# EAGLE board Qwiic Pressure Sensor - MS5637-Panel (EAGLE 9.2.1)
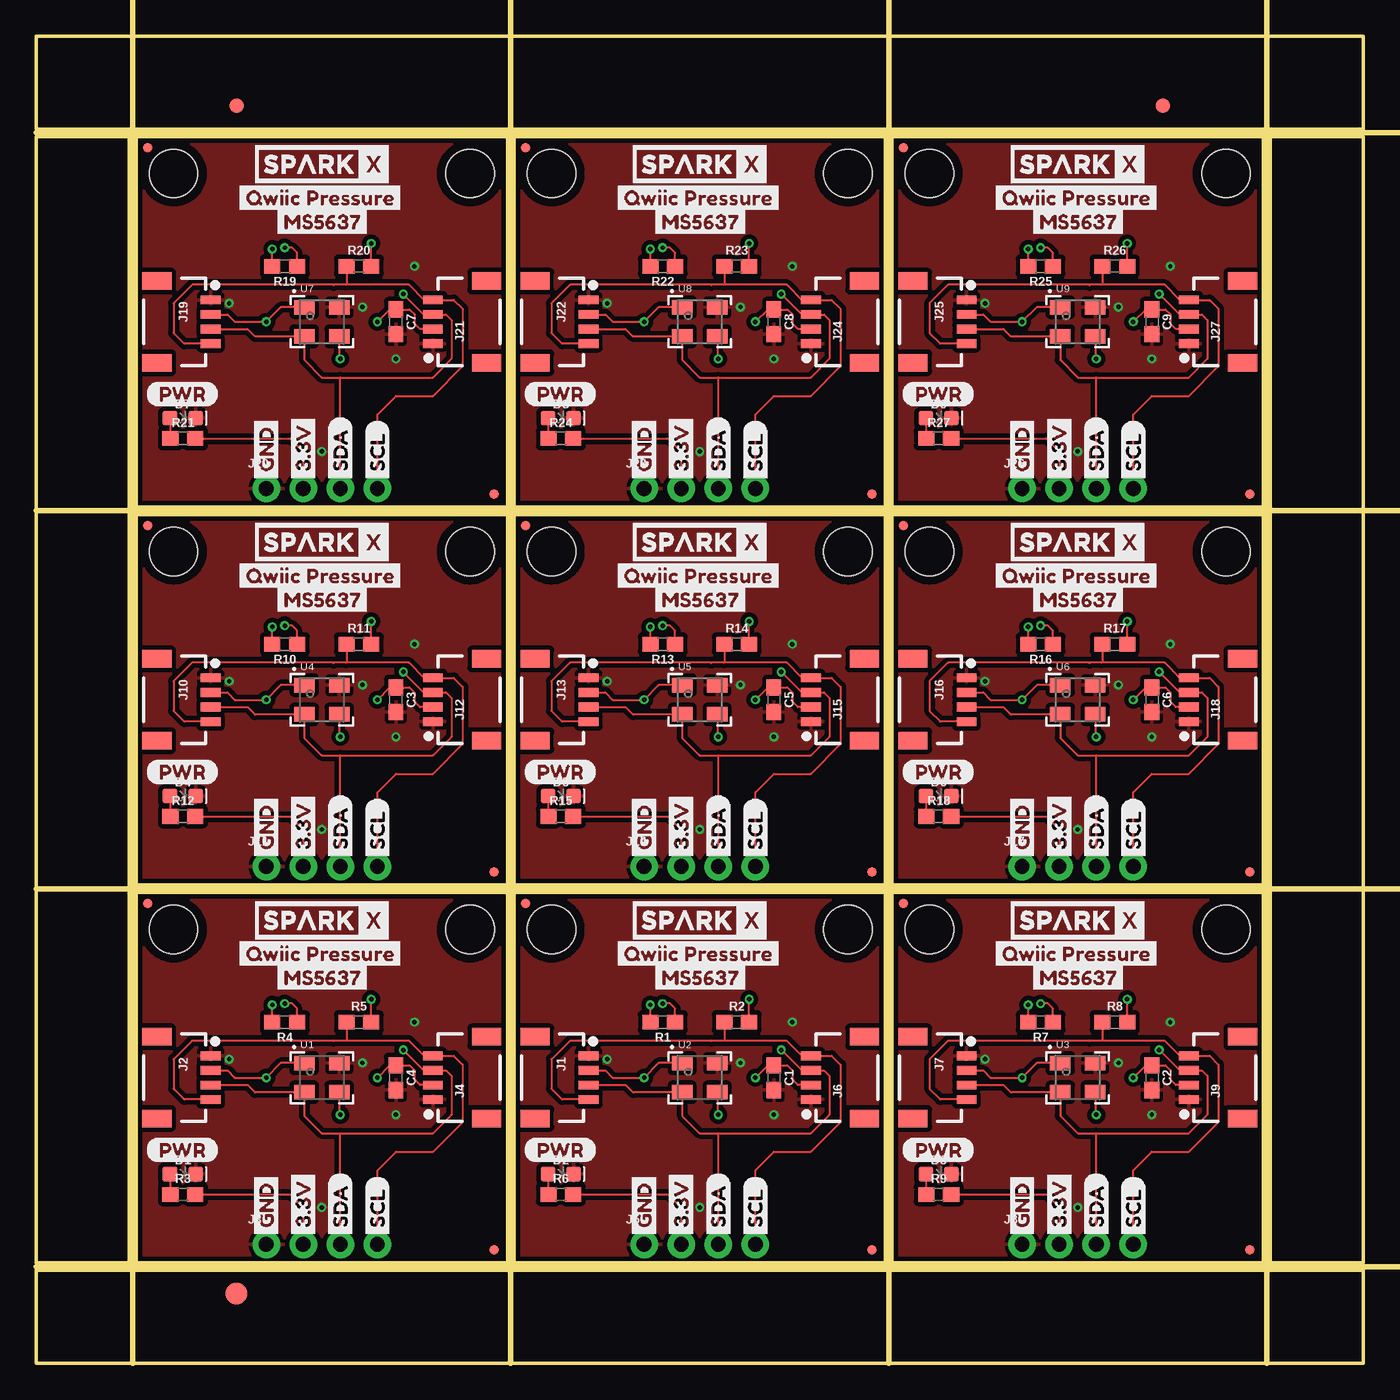
[diagram p0: board, top side]
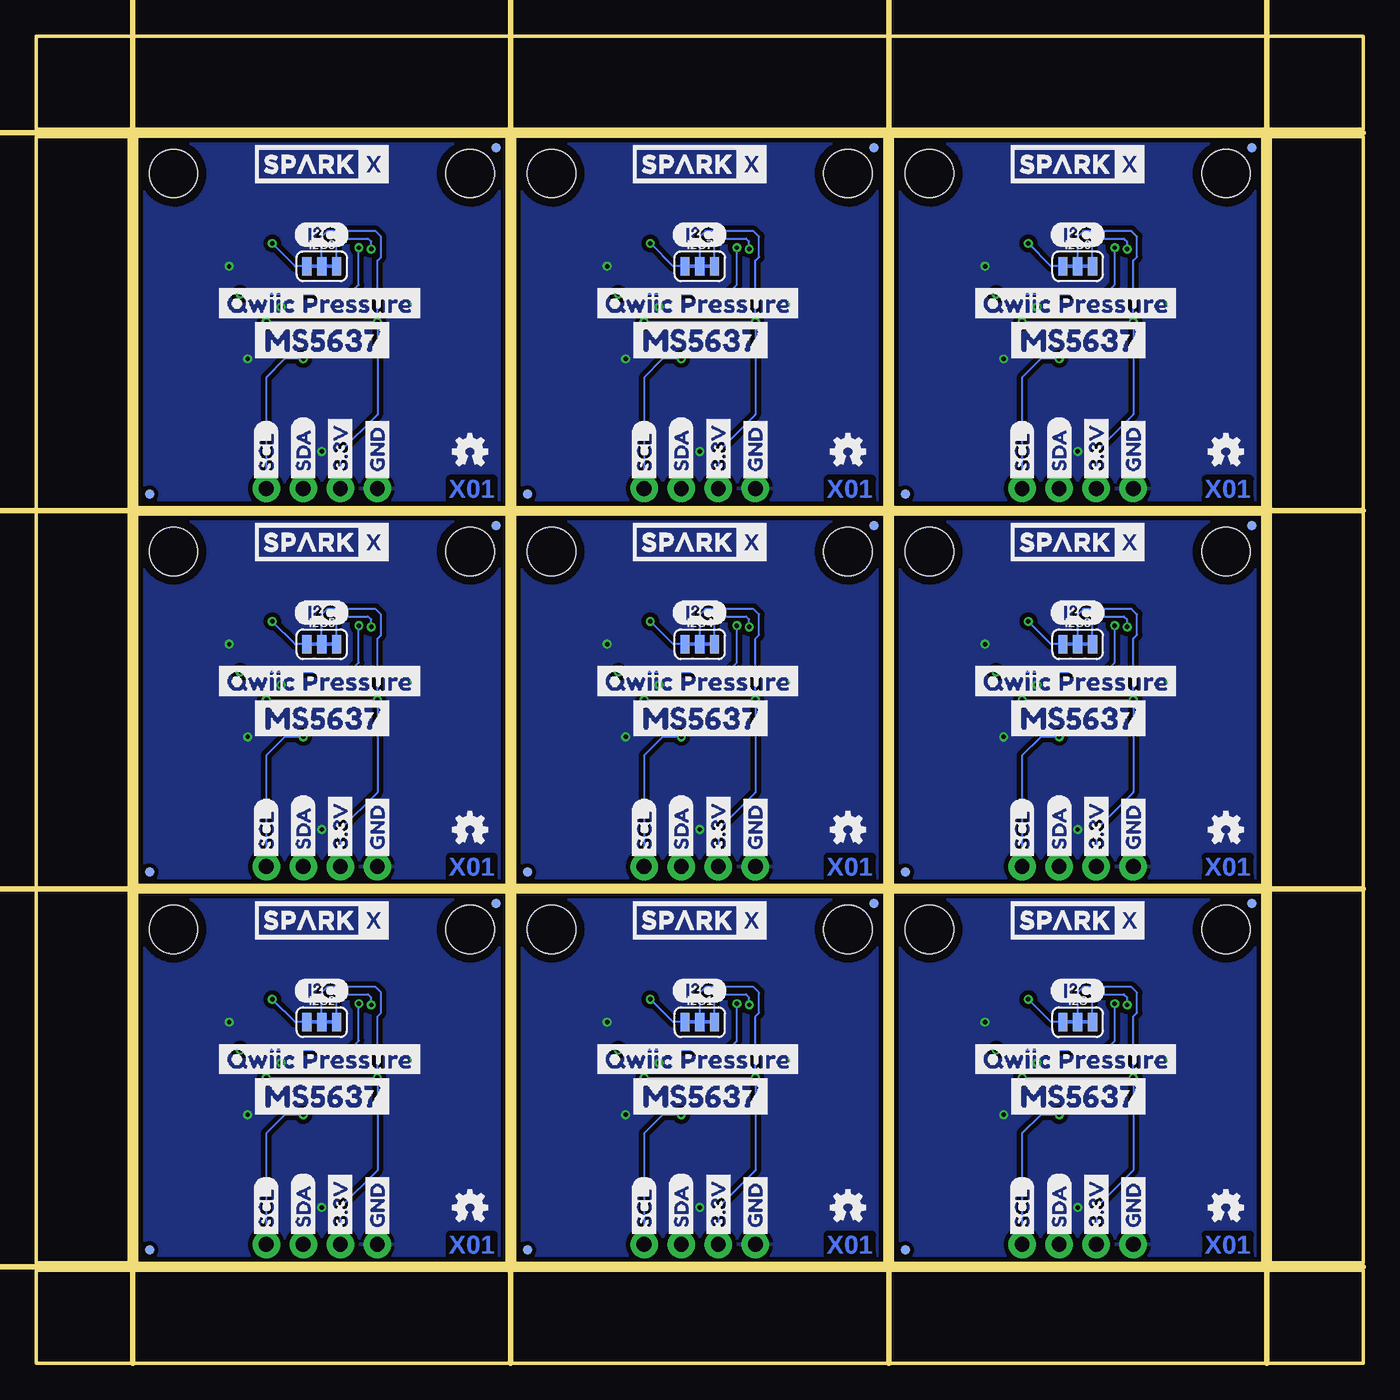
[diagram p1: board, bottom side, seen from below]

Size 90.93 x 90.93 mm. Coordinates in mm from the lower left corner, seen from the top.
Outline: 6.86,6.86 6.86,32.26 32.26,32.26 32.26,6.86 6.86,6.86
Outline: 32.77,6.86 32.77,32.26 58.17,32.26 58.17,6.86 32.77,6.86
Outline: 58.67,6.86 58.67,32.26 84.07,32.26 84.07,6.86 58.67,6.86
Outline: 6.86,32.77 6.86,58.17 32.26,58.17 32.26,32.77 6.86,32.77
Outline: 32.77,32.77 32.77,58.17 58.17,58.17 58.17,32.77 32.77,32.77
Outline: 58.67,32.77 58.67,58.17 84.07,58.17 84.07,32.77 58.67,32.77
Outline: 6.86,58.67 6.86,84.07 32.26,84.07 32.26,58.67 6.86,58.67
Outline: 32.77,58.67 32.77,84.07 58.17,84.07 58.17,58.67 32.77,58.67
Outline: 58.67,58.67 58.67,84.07 84.07,84.07 84.07,58.67 58.67,58.67
Outline: 0,6.35 90.93,6.35 90.93,0 0,0 0,6.35
Outline: 84.58,84.07 90.93,84.07 90.93,6.86 84.58,6.86 84.58,84.07
Outline: 0,90.93 90.93,90.93 90.93,84.58 0,84.58 0,90.93
Outline: 0,84.07 6.35,84.07 6.35,6.86 0,6.86 0,84.07
Copper layers (1*16): Top 0.035mm / dielectric 1.5mm / Bottom 0.035mm
Design rules "SparkFun-2-layer-PCBWay-LIMIT": minimum track width 6mil, minimum drill 0.3mm, track to track 6mil, track to pad 6mil, pad to pad 6mil, via to via 6mil, smd to smd 6mil, copper to edge 6mil, drill to drill 6mil, minimum pad ring 6mil, minimum via ring 6mil, stop-mask expansion 4mil, vias tented up to drill 25mil, thermal gap 10mil
Milling: 8 lines

## Footprints (pad centres in the part's own frame; a part is rotated, then mirrored left to right if it is on the bottom)
0603 = smd 1.1 x 1: 1 -0.85,0; 2 0.85,0
LED-0603 = smd 1 x 1: A -0.877,0; C 0.877,0
FIDUCIAL-1X2 = smd 1 x 1: 1 0,0
FIDUCIAL-1.5X3 = smd 1.5 x 1.5: 1 0,0
SMT-JUMPER_3_2-NC_TRACE_SILK = smd 0.635 x 1.27: 1 -1.016,0; 2 0,0; 3 1.016,0
1X04_1MM_RA = smd 0.6 x 1.35: 1 -1.5,0; 2 -0.5,0; 3 0.5,0; 4 1.5,0 | smd 1.2 x 2: NC1 2.8,-3.675; NC2 -2.8,-3.675
1X04_NO_SILK = drill 1.016 pad 1.88: 1 0,0; 2 2.54,0; 3 5.08,0; 4 7.62,0
MICRO-FIDUCIAL = smd 0.635 x 0.635: 1 0,0
STAND-OFF = hole 3.302: 0,0
MS5637 = smd 1.4 x 1: 1 -1.2,1; 2 -1.2,-1; 3 1.2,-1; 4 1.2,1

## Placement (x,y rotation side)
C1  0.1uF  [0603]  50.55,19.56 270 top
C2  0.1uF  [0603]  76.45,19.56 270 top
C3  0.1uF  [0603]  24.64,45.47 270 top
C4  0.1uF  [0603]  24.64,19.56 270 top
C5  0.1uF  [0603]  50.55,45.47 270 top
C6  0.1uF  [0603]  76.45,45.47 270 top
C7  0.1uF  [0603]  24.64,71.37 270 top
C8  0.1uF  [0603]  50.55,71.37 270 top
C9  0.1uF  [0603]  76.45,71.37 270 top
D1  RED  [LED-0603]  10.03,12.95 0 top
D2  RED  [LED-0603]  35.94,12.95 0 top
D3  RED  [LED-0603]  61.85,12.95 0 top
D4  RED  [LED-0603]  10.03,38.86 0 top
D5  RED  [LED-0603]  35.94,38.86 0 top
D6  RED  [LED-0603]  61.85,38.86 0 top
D7  RED  [LED-0603]  10.03,64.77 0 top
D8  RED  [LED-0603]  35.94,64.77 0 top
D9  RED  [LED-0603]  61.85,64.77 0 top
E$1  [FIDUCIAL-1X2]  13.72,86.17 0 top
E$2  [FIDUCIAL-1X2]  77.22,86.17 0 top
E$3  [FIDUCIAL-1.5X3]  13.72,4.76 0 top
I2C  [SMT-JUMPER_3_2-NC_TRACE_SILK]  19.56,23.37 0 bottom
I2C1  [SMT-JUMPER_3_2-NC_TRACE_SILK]  45.47,23.37 0 bottom
I2C2  [SMT-JUMPER_3_2-NC_TRACE_SILK]  71.37,23.37 0 bottom
I2C3  [SMT-JUMPER_3_2-NC_TRACE_SILK]  19.56,49.28 0 bottom
I2C4  [SMT-JUMPER_3_2-NC_TRACE_SILK]  45.47,49.28 0 bottom
I2C5  [SMT-JUMPER_3_2-NC_TRACE_SILK]  71.37,49.28 0 bottom
I2C6  [SMT-JUMPER_3_2-NC_TRACE_SILK]  19.56,75.18 0 bottom
I2C7  [SMT-JUMPER_3_2-NC_TRACE_SILK]  45.47,75.18 0 bottom
I2C8  [SMT-JUMPER_3_2-NC_TRACE_SILK]  71.37,75.18 0 bottom
J1  [1X04_1MM_RA]  37.85,19.56 270 top
J2  [1X04_1MM_RA]  11.94,19.56 270 top
J3  PTH  [1X04_NO_SILK]  15.75,8.13 0 top
J4  [1X04_1MM_RA]  27.18,19.56 90 top
J5  PTH  [1X04_NO_SILK]  41.66,8.13 0 top
J6  [1X04_1MM_RA]  53.09,19.56 90 top
J7  [1X04_1MM_RA]  63.75,19.56 270 top
J8  PTH  [1X04_NO_SILK]  67.56,8.13 0 top
J9  [1X04_1MM_RA]  78.99,19.56 90 top
J10  [1X04_1MM_RA]  11.94,45.47 270 top
J11  PTH  [1X04_NO_SILK]  15.75,34.04 0 top
J12  [1X04_1MM_RA]  27.18,45.47 90 top
J13  [1X04_1MM_RA]  37.85,45.47 270 top
J14  PTH  [1X04_NO_SILK]  41.66,34.04 0 top
J15  [1X04_1MM_RA]  53.09,45.47 90 top
J16  [1X04_1MM_RA]  63.75,45.47 270 top
J17  PTH  [1X04_NO_SILK]  67.56,34.04 0 top
J18  [1X04_1MM_RA]  78.99,45.47 90 top
J19  [1X04_1MM_RA]  11.94,71.37 270 top
J20  PTH  [1X04_NO_SILK]  15.75,59.94 0 top
J21  [1X04_1MM_RA]  27.18,71.37 90 top
J22  [1X04_1MM_RA]  37.85,71.37 270 top
J23  PTH  [1X04_NO_SILK]  41.66,59.94 0 top
J24  [1X04_1MM_RA]  53.09,71.37 90 top
J25  [1X04_1MM_RA]  63.75,71.37 270 top
J26  PTH  [1X04_NO_SILK]  67.56,59.94 0 top
J27  [1X04_1MM_RA]  78.99,71.37 90 top
JP1  FIDUCIALUFIDUCIAL  [MICRO-FIDUCIAL]  7.62,31.5 0 bottom
JP2  FIDUCIALUFIDUCIAL  [MICRO-FIDUCIAL]  31.37,7.75 0 top
JP3  STAND-OFF  [STAND-OFF]  9.4,29.72 0 top
JP4  STAND-OFF  [STAND-OFF]  29.72,29.72 0 top
JP5  FIDUCIALUFIDUCIAL  [MICRO-FIDUCIAL]  31.37,7.75 0 bottom
JP6  FIDUCIALUFIDUCIAL  [MICRO-FIDUCIAL]  7.62,31.5 0 top
JP7  STAND-OFF  [STAND-OFF]  35.31,29.72 0 top
JP8  STAND-OFF  [STAND-OFF]  55.63,29.72 0 top
JP9  FIDUCIALUFIDUCIAL  [MICRO-FIDUCIAL]  57.28,7.75 0 top
JP10  FIDUCIALUFIDUCIAL  [MICRO-FIDUCIAL]  33.53,31.5 0 top
JP11  FIDUCIALUFIDUCIAL  [MICRO-FIDUCIAL]  33.53,31.5 0 bottom
JP12  FIDUCIALUFIDUCIAL  [MICRO-FIDUCIAL]  57.28,7.75 0 bottom
JP13  STAND-OFF  [STAND-OFF]  61.21,29.72 0 top
JP14  STAND-OFF  [STAND-OFF]  81.53,29.72 0 top
JP15  FIDUCIALUFIDUCIAL  [MICRO-FIDUCIAL]  83.19,7.75 0 top
JP16  FIDUCIALUFIDUCIAL  [MICRO-FIDUCIAL]  59.44,31.5 0 top
JP17  FIDUCIALUFIDUCIAL  [MICRO-FIDUCIAL]  59.44,31.5 0 bottom
JP18  FIDUCIALUFIDUCIAL  [MICRO-FIDUCIAL]  83.19,7.75 0 bottom
JP19  STAND-OFF  [STAND-OFF]  9.4,55.63 0 top
JP20  STAND-OFF  [STAND-OFF]  29.72,55.63 0 top
JP21  FIDUCIALUFIDUCIAL  [MICRO-FIDUCIAL]  31.37,33.66 0 top
JP22  FIDUCIALUFIDUCIAL  [MICRO-FIDUCIAL]  7.62,57.4 0 top
JP23  FIDUCIALUFIDUCIAL  [MICRO-FIDUCIAL]  7.62,57.4 0 bottom
JP24  FIDUCIALUFIDUCIAL  [MICRO-FIDUCIAL]  31.37,33.66 0 bottom
JP25  STAND-OFF  [STAND-OFF]  35.31,55.63 0 top
JP26  STAND-OFF  [STAND-OFF]  55.63,55.63 0 top
JP27  FIDUCIALUFIDUCIAL  [MICRO-FIDUCIAL]  57.28,33.66 0 top
JP28  FIDUCIALUFIDUCIAL  [MICRO-FIDUCIAL]  33.53,57.4 0 top
JP29  FIDUCIALUFIDUCIAL  [MICRO-FIDUCIAL]  33.53,57.4 0 bottom
JP30  FIDUCIALUFIDUCIAL  [MICRO-FIDUCIAL]  57.28,33.66 0 bottom
JP31  STAND-OFF  [STAND-OFF]  61.21,55.63 0 top
JP32  STAND-OFF  [STAND-OFF]  81.53,55.63 0 top
JP33  FIDUCIALUFIDUCIAL  [MICRO-FIDUCIAL]  83.19,33.66 0 top
JP34  FIDUCIALUFIDUCIAL  [MICRO-FIDUCIAL]  59.44,57.4 0 top
JP35  FIDUCIALUFIDUCIAL  [MICRO-FIDUCIAL]  59.44,57.4 0 bottom
JP36  FIDUCIALUFIDUCIAL  [MICRO-FIDUCIAL]  83.19,33.66 0 bottom
JP37  STAND-OFF  [STAND-OFF]  9.4,81.53 0 top
JP38  STAND-OFF  [STAND-OFF]  29.72,81.53 0 top
JP39  FIDUCIALUFIDUCIAL  [MICRO-FIDUCIAL]  31.37,59.56 0 top
JP40  FIDUCIALUFIDUCIAL  [MICRO-FIDUCIAL]  7.62,83.31 0 top
JP41  FIDUCIALUFIDUCIAL  [MICRO-FIDUCIAL]  7.62,83.31 0 bottom
JP42  FIDUCIALUFIDUCIAL  [MICRO-FIDUCIAL]  31.37,59.56 0 bottom
JP43  STAND-OFF  [STAND-OFF]  35.31,81.53 0 top
JP44  STAND-OFF  [STAND-OFF]  55.63,81.53 0 top
JP45  FIDUCIALUFIDUCIAL  [MICRO-FIDUCIAL]  57.28,59.56 0 top
JP46  FIDUCIALUFIDUCIAL  [MICRO-FIDUCIAL]  33.53,83.31 0 top
JP47  FIDUCIALUFIDUCIAL  [MICRO-FIDUCIAL]  33.53,83.31 0 bottom
JP48  FIDUCIALUFIDUCIAL  [MICRO-FIDUCIAL]  57.28,59.56 0 bottom
JP49  STAND-OFF  [STAND-OFF]  61.21,81.53 0 top
JP50  STAND-OFF  [STAND-OFF]  81.53,81.53 0 top
JP51  FIDUCIALUFIDUCIAL  [MICRO-FIDUCIAL]  83.19,59.56 0 top
JP52  FIDUCIALUFIDUCIAL  [MICRO-FIDUCIAL]  59.44,83.31 0 top
JP53  FIDUCIALUFIDUCIAL  [MICRO-FIDUCIAL]  59.44,83.31 0 bottom
JP54  FIDUCIALUFIDUCIAL  [MICRO-FIDUCIAL]  83.19,59.56 0 bottom
LOGO1  OSHW-LOGOMINI  [OSHW-LOGO-MINI]  9.4,10.67 0 bottom
LOGO2  OSHW-LOGOMINI  [OSHW-LOGO-MINI]  35.31,10.67 0 bottom
LOGO3  OSHW-LOGOMINI  [OSHW-LOGO-MINI]  61.21,10.67 0 bottom
LOGO4  OSHW-LOGOMINI  [OSHW-LOGO-MINI]  9.4,36.58 0 bottom
LOGO5  OSHW-LOGOMINI  [OSHW-LOGO-MINI]  35.31,36.58 0 bottom
LOGO6  OSHW-LOGOMINI  [OSHW-LOGO-MINI]  61.21,36.58 0 bottom
LOGO7  OSHW-LOGOMINI  [OSHW-LOGO-MINI]  9.4,62.48 0 bottom
LOGO8  OSHW-LOGOMINI  [OSHW-LOGO-MINI]  35.31,62.48 0 bottom
LOGO9  OSHW-LOGOMINI  [OSHW-LOGO-MINI]  61.21,62.48 0 bottom
R1  2.2k  [0603]  42.93,23.37 180 top
R2  2.2k  [0603]  48.01,23.37 0 top
R3  1k  [0603]  10.03,11.56 0 top
R4  2.2k  [0603]  17.02,23.37 180 top
R5  2.2k  [0603]  22.1,23.37 0 top
R6  1k  [0603]  35.94,11.56 0 top
R7  2.2k  [0603]  68.83,23.37 180 top
R8  2.2k  [0603]  73.91,23.37 0 top
R9  1k  [0603]  61.85,11.56 0 top
R10  2.2k  [0603]  17.02,49.28 180 top
R11  2.2k  [0603]  22.1,49.28 0 top
R12  1k  [0603]  10.03,37.46 0 top
R13  2.2k  [0603]  42.93,49.28 180 top
R14  2.2k  [0603]  48.01,49.28 0 top
R15  1k  [0603]  35.94,37.46 0 top
R16  2.2k  [0603]  68.83,49.28 180 top
R17  2.2k  [0603]  73.91,49.28 0 top
R18  1k  [0603]  61.85,37.46 0 top
R19  2.2k  [0603]  17.02,75.18 180 top
R20  2.2k  [0603]  22.1,75.18 0 top
R21  1k  [0603]  10.03,63.37 0 top
R22  2.2k  [0603]  42.93,75.18 180 top
R23  2.2k  [0603]  48.01,75.18 0 top
R24  1k  [0603]  35.94,63.37 0 top
R25  2.2k  [0603]  68.83,75.18 180 top
R26  2.2k  [0603]  73.91,75.18 0 top
R27  1k  [0603]  61.85,63.37 0 top
U1  MS5637  [MS5637]  19.56,19.56 0 top
U2  MS5637  [MS5637]  45.47,19.56 0 top
U3  MS5637  [MS5637]  71.37,19.56 0 top
U4  MS5637  [MS5637]  19.56,45.47 0 top
U5  MS5637  [MS5637]  45.47,45.47 0 top
U6  MS5637  [MS5637]  71.37,45.47 0 top
U7  MS5637  [MS5637]  19.56,71.37 0 top
U8  MS5637  [MS5637]  45.47,71.37 0 top
U9  MS5637  [MS5637]  71.37,71.37 0 top
U$1  SPARKX-LOGO4  [SPARKX-MEDIUM]  19.56,30.35 0 top
U$2  SPARKX-LOGO4  [SPARKX-MEDIUM]  19.56,30.35 0 bottom
U$3  [GND1]  15.75,8.38 90 bottom
U$4  [3#3V2]  18.29,8.38 90 bottom
U$5  [SDA8]  20.83,8.38 90 bottom
U$6  [SCL9]  23.37,8.38 90 bottom
U$7  [MS56371]  16,26.42 0 top
U$8  [QWIIC_PRESSURE0]  13.46,28.07 0 top
U$9  SPARKX-LOGO4  [SPARKX-MEDIUM]  45.47,30.35 0 bottom
U$10  [(PWR)]  7.49,14.61 0 top
U$11  [(I_SUPER2_C)]  21.46,25.53 0 bottom
U$12  SPARKX-LOGO4  [SPARKX-MEDIUM]  45.47,30.35 0 top
U$13  [QWIIC_PRESSURE0]  27.18,20.83 0 bottom
U$14  [MS56371]  24.89,18.29 0 bottom
U$15  [3#3V2]  44.2,8.38 90 top
U$16  [GND1]  41.66,8.38 90 top
U$17  [SCL9]  49.28,8.38 90 top
U$18  [SDA8]  46.74,8.38 90 top
U$19  [GND1]  41.66,8.38 90 bottom
U$20  [3#3V2]  44.2,8.38 90 bottom
U$21  [3#3V2]  18.29,8.38 90 top
U$22  [GND1]  15.75,8.38 90 top
U$23  [SDA8]  46.74,8.38 90 bottom
U$24  [SCL9]  49.28,8.38 90 bottom
U$25  [(PWR)]  33.4,14.61 0 top
U$26  [SCL9]  23.37,8.38 90 top
U$27  [SDA8]  20.83,8.38 90 top
U$28  [(I_SUPER2_C)]  47.37,25.53 0 bottom
U$29  [QWIIC_PRESSURE0]  53.09,20.83 0 bottom
U$30  [MS56371]  50.8,18.29 0 bottom
U$31  [MS56371]  41.91,26.42 0 top
U$32  [QWIIC_PRESSURE0]  39.37,28.07 0 top
U$33  SPARKX-LOGO4  [SPARKX-MEDIUM]  71.37,30.35 0 bottom
U$34  SPARKX-LOGO4  [SPARKX-MEDIUM]  71.37,30.35 0 top
U$35  [3#3V2]  70.1,8.38 90 top
U$36  [GND1]  67.56,8.38 90 top
U$37  [SCL9]  75.18,8.38 90 top
U$38  [SDA8]  72.64,8.38 90 top
U$39  [GND1]  67.56,8.38 90 bottom
U$40  [3#3V2]  70.1,8.38 90 bottom
U$41  [SDA8]  72.64,8.38 90 bottom
U$42  [SCL9]  75.18,8.38 90 bottom
U$43  [(PWR)]  59.31,14.61 0 top
U$44  [(I_SUPER2_C)]  73.28,25.53 0 bottom
U$45  [QWIIC_PRESSURE0]  78.99,20.83 0 bottom
U$46  [MS56371]  76.71,18.29 0 bottom
U$47  [MS56371]  67.82,26.42 0 top
U$48  [QWIIC_PRESSURE0]  65.28,28.07 0 top
U$49  SPARKX-LOGO4  [SPARKX-MEDIUM]  19.56,56.26 0 bottom
U$50  SPARKX-LOGO4  [SPARKX-MEDIUM]  19.56,56.26 0 top
U$51  [3#3V2]  18.29,34.29 90 top
U$52  [GND1]  15.75,34.29 90 top
U$53  [SCL9]  23.37,34.29 90 top
U$54  [SDA8]  20.83,34.29 90 top
U$55  [GND1]  15.75,34.29 90 bottom
U$56  [3#3V2]  18.29,34.29 90 bottom
U$57  [SDA8]  20.83,34.29 90 bottom
U$58  [SCL9]  23.37,34.29 90 bottom
U$59  [(PWR)]  7.49,40.51 0 top
U$60  [(I_SUPER2_C)]  21.46,51.43 0 bottom
U$61  [QWIIC_PRESSURE0]  27.18,46.74 0 bottom
U$62  [MS56371]  24.89,44.2 0 bottom
U$63  [MS56371]  16,52.32 0 top
U$64  [QWIIC_PRESSURE0]  13.46,53.97 0 top
U$65  SPARKX-LOGO4  [SPARKX-MEDIUM]  45.47,56.26 0 bottom
U$66  SPARKX-LOGO4  [SPARKX-MEDIUM]  45.47,56.26 0 top
U$67  [3#3V2]  44.2,34.29 90 top
U$68  [GND1]  41.66,34.29 90 top
U$69  [SCL9]  49.28,34.29 90 top
U$70  [SDA8]  46.74,34.29 90 top
U$71  [GND1]  41.66,34.29 90 bottom
U$72  [3#3V2]  44.2,34.29 90 bottom
U$73  [SDA8]  46.74,34.29 90 bottom
U$74  [SCL9]  49.28,34.29 90 bottom
U$75  [(PWR)]  33.4,40.51 0 top
U$76  [(I_SUPER2_C)]  47.37,51.43 0 bottom
U$77  [QWIIC_PRESSURE0]  53.09,46.74 0 bottom
U$78  [MS56371]  50.8,44.2 0 bottom
U$79  [MS56371]  41.91,52.32 0 top
U$80  [QWIIC_PRESSURE0]  39.37,53.97 0 top
U$81  SPARKX-LOGO4  [SPARKX-MEDIUM]  71.37,56.26 0 bottom
U$82  SPARKX-LOGO4  [SPARKX-MEDIUM]  71.37,56.26 0 top
U$83  [3#3V2]  70.1,34.29 90 top
U$84  [GND1]  67.56,34.29 90 top
U$85  [SCL9]  75.18,34.29 90 top
U$86  [SDA8]  72.64,34.29 90 top
U$87  [GND1]  67.56,34.29 90 bottom
U$88  [3#3V2]  70.1,34.29 90 bottom
U$89  [SDA8]  72.64,34.29 90 bottom
U$90  [SCL9]  75.18,34.29 90 bottom
U$91  [(PWR)]  59.31,40.51 0 top
U$92  [(I_SUPER2_C)]  73.28,51.43 0 bottom
U$93  [QWIIC_PRESSURE0]  78.99,46.74 0 bottom
U$94  [MS56371]  76.71,44.2 0 bottom
U$95  [MS56371]  67.82,52.32 0 top
U$96  [QWIIC_PRESSURE0]  65.28,53.97 0 top
U$97  SPARKX-LOGO4  [SPARKX-MEDIUM]  19.56,82.17 0 bottom
U$98  SPARKX-LOGO4  [SPARKX-MEDIUM]  19.56,82.17 0 top
U$99  [3#3V2]  18.29,60.2 90 top
U$100  [GND1]  15.75,60.2 90 top
U$101  [SCL9]  23.37,60.2 90 top
U$102  [SDA8]  20.83,60.2 90 top
U$103  [GND1]  15.75,60.2 90 bottom
U$104  [3#3V2]  18.29,60.2 90 bottom
U$105  [SDA8]  20.83,60.2 90 bottom
U$106  [SCL9]  23.37,60.2 90 bottom
U$107  [(PWR)]  7.49,66.42 0 top
U$108  [(I_SUPER2_C)]  21.46,77.34 0 bottom
U$109  [QWIIC_PRESSURE0]  27.18,72.64 0 bottom
U$110  [MS56371]  24.89,70.1 0 bottom
U$111  [MS56371]  16,78.23 0 top
U$112  [QWIIC_PRESSURE0]  13.46,79.88 0 top
U$113  SPARKX-LOGO4  [SPARKX-MEDIUM]  45.47,82.17 0 bottom
U$114  SPARKX-LOGO4  [SPARKX-MEDIUM]  45.47,82.17 0 top
U$115  [3#3V2]  44.2,60.2 90 top
U$116  [GND1]  41.66,60.2 90 top
U$117  [SCL9]  49.28,60.2 90 top
U$118  [SDA8]  46.74,60.2 90 top
U$119  [GND1]  41.66,60.2 90 bottom
U$120  [3#3V2]  44.2,60.2 90 bottom
U$121  [SDA8]  46.74,60.2 90 bottom
U$122  [SCL9]  49.28,60.2 90 bottom
U$123  [(PWR)]  33.4,66.42 0 top
U$124  [(I_SUPER2_C)]  47.37,77.34 0 bottom
U$125  [QWIIC_PRESSURE0]  53.09,72.64 0 bottom
U$126  [MS56371]  50.8,70.1 0 bottom
U$127  [MS56371]  41.91,78.23 0 top
U$128  [QWIIC_PRESSURE0]  39.37,79.88 0 top
U$129  SPARKX-LOGO4  [SPARKX-MEDIUM]  71.37,82.17 0 bottom
U$130  SPARKX-LOGO4  [SPARKX-MEDIUM]  71.37,82.17 0 top
U$131  [3#3V2]  70.1,60.2 90 top
U$132  [GND1]  67.56,60.2 90 top
U$133  [SCL9]  75.18,60.2 90 top
U$134  [SDA8]  72.64,60.2 90 top
U$135  [GND1]  67.56,60.2 90 bottom
U$136  [3#3V2]  70.1,60.2 90 bottom
U$137  [SDA8]  72.64,60.2 90 bottom
U$138  [SCL9]  75.18,60.2 90 bottom
U$139  [(PWR)]  59.31,66.42 0 top
U$140  [(I_SUPER2_C)]  73.28,77.34 0 bottom
U$141  [QWIIC_PRESSURE0]  78.99,72.64 0 bottom
U$142  [MS56371]  76.71,70.1 0 bottom
U$143  [MS56371]  67.82,78.23 0 top
U$144  [QWIIC_PRESSURE0]  65.28,79.88 0 top

## Library data of the parts
C1-C9 = SparkFun-Capacitors; PROD_ID: CAP-00810
D1-D9 = SparkFun-LED; PROD_ID: DIO-00819
E$1 E$2 LOGO1-LOGO9 = SparkFun-Aesthetics
E$3 = SparkFun-Retired
I2C I2C1-I2C8 = SparkFun-Jumpers
J1 J2 J4 J6 J7 J9 J10 J12 J13 J15 J16 J18 J19 J21 J22 J24 J25 J27 = SparkFun-Connectors; PROD_ID: CONN-13694
J3 J5 J8 J11 J14 J17 J20 J23 J26 U$1 U$2 U$9 U$12 U$33 U$34 U$49 U$50 U$65 U$66 U$81 U$82 U$97 U$98 U$113 U$114 U$129 U$130 = SparkX
JP1-JP54 = SparkFun
R1 R2 R4 R5 R7 R8 R10 R11 R13 R14 R16 R17 R19 R20 R22 R23 R25 R26 = SparkFun-Resistors; PROD_ID: RES-08272
R3 R6 R9 R12 R15 R18 R21 R24 R27 = SparkFun-Resistors; PROD_ID: RES-07856
U1-U9 = MS5637
U$3-U$6 U$10 U$11 U$15-U$28 U$35-U$44 U$51-U$60 U$67-U$76 U$83-U$92 U$99-U$108 U$115-U$124 U$131-U$140 = Labels-0_04
U$7 U$8 U$31 U$32 U$47 U$48 U$63 U$64 U$79 U$80 U$95 U$96 U$111 U$112 U$127 U$128 U$143 U$144 = buzzard_labels (2)
U$13 U$14 U$29 U$30 U$45 U$46 U$61 U$62 U$77 U$78 U$93 U$94 U$109 U$110 U$125 U$126 U$141 U$142 = buzzard_labels (1)

## Nets
3.3V: C4.1 I2C.2 J2.2 J3.2 J4.2 R3.2 U1.1
3.3V1: C1.1 I2C1.2 J1.2 J5.2 J6.2 R6.2 U2.1
3.3V2: C2.1 I2C2.2 J7.2 J8.2 J9.2 R9.2 U3.1
3.3V3: C3.1 I2C3.2 J10.2 J11.2 J12.2 R12.2 U4.1
3.3V4: C5.1 I2C4.2 J13.2 J14.2 J15.2 R15.2 U5.1
3.3V5: C6.1 I2C5.2 J16.2 J17.2 J18.2 R18.2 U6.1
3.3V6: C7.1 I2C6.2 J19.2 J20.2 J21.2 R21.2 U7.1
3.3V7: C8.1 I2C7.2 J22.2 J23.2 J24.2 R24.2 U8.1
3.3V8: C9.1 I2C8.2 J25.2 J26.2 J27.2 R27.2 U9.1
GND: C4.2 D1.C J2.1 J3.1 J4.1 U1.4
GND1: C1.2 D2.C J1.1 J5.1 J6.1 U2.4
GND2: C2.2 D3.C J7.1 J8.1 J9.1 U3.4
GND3: C3.2 D4.C J10.1 J11.1 J12.1 U4.4
GND4: C5.2 D5.C J13.1 J14.1 J15.1 U5.4
GND5: C6.2 D6.C J16.1 J17.1 J18.1 U6.4
GND6: C7.2 D7.C J19.1 J20.1 J21.1 U7.4
GND7: C8.2 D8.C J22.1 J23.1 J24.1 U8.4
GND8: C9.2 D9.C J25.1 J26.1 J27.1 U9.4
N$1: I2C.1 R5.2
N$2: I2C.3 R4.2
N$3: D1.A R3.1
N$4: I2C1.1 R2.2
N$5: I2C1.3 R1.2
N$6: D2.A R6.1
N$7: I2C2.1 R8.2
N$8: I2C2.3 R7.2
N$9: D3.A R9.1
N$10: I2C3.1 R11.2
N$11: I2C3.3 R10.2
N$12: D4.A R12.1
N$13: I2C4.1 R14.2
N$14: I2C4.3 R13.2
N$15: D5.A R15.1
N$16: I2C5.1 R17.2
N$17: I2C5.3 R16.2
N$18: D6.A R18.1
N$19: I2C6.1 R20.2
N$20: I2C6.3 R19.2
N$21: D7.A R21.1
N$22: I2C7.1 R23.2
N$23: I2C7.3 R22.2
N$24: D8.A R24.1
N$25: I2C8.1 R26.2
N$26: I2C8.3 R25.2
N$27: D9.A R27.1
SCL: J2.4 J3.4 J4.4 R5.1 U1.3
SCL1: J1.4 J5.4 J6.4 R2.1 U2.3
SCL2: J7.4 J8.4 J9.4 R8.1 U3.3
SCL3: J10.4 J11.4 J12.4 R11.1 U4.3
SCL4: J13.4 J14.4 J15.4 R14.1 U5.3
SCL5: J16.4 J17.4 J18.4 R17.1 U6.3
SCL6: J19.4 J20.4 J21.4 R20.1 U7.3
SCL7: J22.4 J23.4 J24.4 R23.1 U8.3
SCL8: J25.4 J26.4 J27.4 R26.1 U9.3
SDA: J2.3 J3.3 J4.3 R4.1 U1.2
SDA1: J1.3 J5.3 J6.3 R1.1 U2.2
SDA2: J7.3 J8.3 J9.3 R7.1 U3.2
SDA3: J10.3 J11.3 J12.3 R10.1 U4.2
SDA4: J13.3 J14.3 J15.3 R13.1 U5.2
SDA5: J16.3 J17.3 J18.3 R16.1 U6.2
SDA6: J19.3 J20.3 J21.3 R19.1 U7.2
SDA7: J22.3 J23.3 J24.3 R22.1 U8.2
SDA8: J25.3 J26.3 J27.3 R25.1 U9.2

## Tracks (layer width: path | path; a pad name or v marks a point on that pad's centre or on a via)
3.3V  (via drill 0.3)
  Top 0.152: C4.1 25.57,20.41 25.91,20.07 25.91,19.43 26.28,19.06 J4.2 | 24.6,20.37 C4.1 | C4.1 24.22,20.41 v23.37,19.56 | J2.2 13.09,20.06 13.59,19.56 v15.75,19.56 16.75,20.56 U1.1 | J3.2 18.29,10.67 17.4,11.56 R3.2
  Bottom 0.152: I2C.2 19.56,25.4 19.18,25.78 15.88,25.78 15.49,25.4 15.49,24 15.75,23.75 v15.75,19.56 | v23.37,19.56 v15.75,19.56 | v15.75,19.56 15.75,13.21 18.29,10.67 J3.2
3.3V1  (via drill 0.3)
  Top 0.152: C1.1 51.47,20.41 51.82,20.07 51.82,19.43 52.19,19.06 J6.2 | 50.51,20.37 C1.1 | C1.1 50.13,20.41 v49.28,19.56 | J1.2 39,20.06 39.5,19.56 v41.66,19.56 42.66,20.56 U2.1 | J5.2 44.2,10.67 43.31,11.56 R6.2
  Bottom 0.152: I2C1.2 45.47,25.4 45.08,25.78 41.78,25.78 41.4,25.4 41.4,24 41.66,23.75 v41.66,19.56 | v49.28,19.56 v41.66,19.56 | v41.66,19.56 41.66,13.21 44.2,10.67 J5.2
3.3V2  (via drill 0.3)
  Top 0.152: C2.1 77.38,20.41 77.72,20.07 77.72,19.43 78.1,19.06 J9.2 | 76.42,20.37 C2.1 | C2.1 76.03,20.41 v75.18,19.56 | J7.2 64.91,20.06 65.41,19.56 v67.56,19.56 68.56,20.56 U3.1 | J8.2 70.1,10.67 69.22,11.56 R9.2
  Bottom 0.152: I2C2.2 71.37,25.4 70.99,25.78 67.69,25.78 67.31,25.4 67.31,24 67.56,23.75 v67.56,19.56 | v75.18,19.56 v67.56,19.56 | v67.56,19.56 67.56,13.21 70.1,10.67 J8.2
3.3V3  (via drill 0.3)
  Top 0.152: C3.1 25.57,46.32 25.91,45.97 25.91,45.34 26.28,44.97 J12.2 | 24.6,46.28 C3.1 | C3.1 24.22,46.32 v23.37,45.47 | J10.2 13.09,45.97 13.59,45.47 v15.75,45.47 16.75,46.47 U4.1 | J11.2 18.29,36.58 17.4,37.46 R12.2
  Bottom 0.152: I2C3.2 19.56,51.31 19.18,51.69 15.88,51.69 15.49,51.31 15.49,49.91 15.75,49.66 v15.75,45.47 | v23.37,45.47 v15.75,45.47 | v15.75,45.47 15.75,39.12 18.29,36.58 J11.2
3.3V4  (via drill 0.3)
  Top 0.152: C5.1 51.47,46.32 51.82,45.97 51.82,45.34 52.19,44.97 J15.2 | 50.51,46.28 C5.1 | C5.1 50.13,46.32 v49.28,45.47 | J13.2 39,45.97 39.5,45.47 v41.66,45.47 42.66,46.47 U5.1 | J14.2 44.2,36.58 43.31,37.46 R15.2
  Bottom 0.152: I2C4.2 45.47,51.31 45.08,51.69 41.78,51.69 41.4,51.31 41.4,49.91 41.66,49.66 v41.66,45.47 | v49.28,45.47 v41.66,45.47 | v41.66,45.47 41.66,39.12 44.2,36.58 J14.2
3.3V5  (via drill 0.3)
  Top 0.152: C6.1 77.38,46.32 77.72,45.97 77.72,45.34 78.1,44.97 J18.2 | 76.42,46.28 C6.1 | C6.1 76.03,46.32 v75.18,45.47 | J16.2 64.91,45.97 65.41,45.47 v67.56,45.47 68.56,46.47 U6.1 | J17.2 70.1,36.58 69.22,37.46 R18.2
  Bottom 0.152: I2C5.2 71.37,51.31 70.99,51.69 67.69,51.69 67.31,51.31 67.31,49.91 67.56,49.66 v67.56,45.47 | v75.18,45.47 v67.56,45.47 | v67.56,45.47 67.56,39.12 70.1,36.58 J17.2
3.3V6  (via drill 0.3)
  Top 0.152: C7.1 25.57,72.22 25.91,71.88 25.91,71.25 26.28,70.87 J21.2 | 24.6,72.19 C7.1 | C7.1 24.22,72.22 v23.37,71.37 | J19.2 13.09,71.87 13.59,71.37 v15.75,71.37 16.75,72.37 U7.1 | J20.2 18.29,62.48 17.4,63.37 R21.2
  Bottom 0.152: I2C6.2 19.56,77.22 19.18,77.6 15.88,77.6 15.49,77.22 15.49,75.82 15.75,75.56 v15.75,71.37 | v23.37,71.37 v15.75,71.37 | v15.75,71.37 15.75,65.02 18.29,62.48 J20.2
3.3V7  (via drill 0.3)
  Top 0.152: C8.1 51.47,72.22 51.82,71.88 51.82,71.25 52.19,70.87 J24.2 | 50.51,72.19 C8.1 | C8.1 50.13,72.22 v49.28,71.37 | J22.2 39,71.87 39.5,71.37 v41.66,71.37 42.66,72.37 U8.1 | J23.2 44.2,62.48 43.31,63.37 R24.2
  Bottom 0.152: I2C7.2 45.47,77.22 45.08,77.6 41.78,77.6 41.4,77.22 41.4,75.82 41.66,75.56 v41.66,71.37 | v49.28,71.37 v41.66,71.37 | v41.66,71.37 41.66,65.02 44.2,62.48 J23.2
3.3V8  (via drill 0.3)
  Top 0.152: C9.1 77.38,72.22 77.72,71.88 77.72,71.25 78.1,70.87 J27.2 | 76.42,72.19 C9.1 | C9.1 76.03,72.22 v75.18,71.37 | J25.2 64.91,71.87 65.41,71.37 v67.56,71.37 68.56,72.37 U9.1 | J26.2 70.1,62.48 69.22,63.37 R27.2
  Bottom 0.152: I2C8.2 71.37,77.22 70.99,77.6 67.69,77.6 67.31,77.22 67.31,75.82 67.56,75.56 v67.56,71.37 | v75.18,71.37 v67.56,71.37 | v67.56,71.37 67.56,65.02 70.1,62.48 J26.2
GND  (via drill 0.3)
  other vias: 13.21,20.83 24.64,17.02 19.56,10.67 25.91,23.37 22.35,20.57
  pour Bottom (isolate 0.305): 6.86,6.86 6.86,32.26 32.26,32.26 32.26,6.86
  pour Top (isolate 0.305): 6.86,6.86 6.86,32.26 32.26,32.26 32.26,6.86
GND1  (via drill 0.3)
  other vias: 39.12,20.83 50.55,17.02 45.47,10.67 51.82,23.37 48.26,20.57
  pour Bottom (isolate 0.305): 32.77,6.86 32.77,32.26 58.17,32.26 58.17,6.86
  pour Top (isolate 0.305): 32.77,6.86 32.77,32.26 58.17,32.26 58.17,6.86
GND2  (via drill 0.3)
  other vias: 65.02,20.83 76.45,17.02 71.37,10.67 77.72,23.37 74.17,20.57
  pour Bottom (isolate 0.305): 58.67,6.86 58.67,32.26 84.07,32.26 84.07,6.86
  pour Top (isolate 0.305): 58.67,6.86 58.67,32.26 84.07,32.26 84.07,6.86
GND3  (via drill 0.3)
  other vias: 13.21,46.74 24.64,42.93 19.56,36.58 25.91,49.28 22.35,46.48
  pour Bottom (isolate 0.305): 6.86,32.77 6.86,58.17 32.26,58.17 32.26,32.77
  pour Top (isolate 0.305): 6.86,32.77 6.86,58.17 32.26,58.17 32.26,32.77
GND4  (via drill 0.3)
  other vias: 39.12,46.74 50.55,42.93 45.47,36.58 51.82,49.28 48.26,46.48
  pour Bottom (isolate 0.305): 32.77,32.77 32.77,58.17 58.17,58.17 58.17,32.77
  pour Top (isolate 0.305): 32.77,32.77 32.77,58.17 58.17,58.17 58.17,32.77
GND5  (via drill 0.3)
  other vias: 65.02,46.74 76.45,42.93 71.37,36.58 77.72,49.28 74.17,46.48
  pour Bottom (isolate 0.305): 58.67,32.77 58.67,58.17 84.07,58.17 84.07,32.77
  pour Top (isolate 0.305): 58.67,32.77 58.67,58.17 84.07,58.17 84.07,32.77
GND6  (via drill 0.3)
  other vias: 13.21,72.64 24.64,68.83 19.56,62.48 25.91,75.18 22.35,72.39
  pour Bottom (isolate 0.305): 6.86,58.67 6.86,84.07 32.26,84.07 32.26,58.67
  pour Top (isolate 0.305): 6.86,58.67 6.86,84.07 32.26,84.07 32.26,58.67
GND7  (via drill 0.3)
  other vias: 39.12,72.64 50.55,68.83 45.47,62.48 51.82,75.18 48.26,72.39
  pour Bottom (isolate 0.305): 32.77,58.67 32.77,84.07 58.17,84.07 58.17,58.67
  pour Top (isolate 0.305): 32.77,58.67 32.77,84.07 58.17,84.07 58.17,58.67
GND8  (via drill 0.3)
  other vias: 65.02,72.64 76.45,68.83 71.37,62.48 77.72,75.18 74.17,72.39
  pour Bottom (isolate 0.305): 58.67,58.67 58.67,84.07 84.07,84.07 84.07,58.67
  pour Top (isolate 0.305): 58.67,58.67 58.67,84.07 84.07,84.07 84.07,58.67
N$1  (via drill 0.3)
  Top 0.152: R5.2 v22.95,24.93
  Bottom 0.152: I2C.1 21.38,23.37 v22.95,24.93
N$2  (via drill 0.3)
  Top 0.152: R4.2 v16.17,24.55
  Bottom 0.152: I2C.3 18.54,25.02 18.29,25.27 16.38,25.27 16.17,25.06 v16.17,24.55
N$3
  Top 0.152: D1.A 9.16,11.58 R3.1
N$4  (via drill 0.3)
  Top 0.152: R2.2 v48.86,24.93
  Bottom 0.152: I2C1.1 47.29,23.37 v48.86,24.93
N$5  (via drill 0.3)
  Top 0.152: R1.2 v42.08,24.55
  Bottom 0.152: I2C1.3 44.45,25.02 44.2,25.27 42.29,25.27 42.08,25.06 v42.08,24.55
N$6
  Top 0.152: D2.A 35.06,11.58 R6.1
N$7  (via drill 0.3)
  Top 0.152: R8.2 v74.76,24.93
  Bottom 0.152: I2C2.1 73.2,23.37 v74.76,24.93
N$8  (via drill 0.3)
  Top 0.152: R7.2 v67.98,24.55
  Bottom 0.152: I2C2.3 70.36,25.02 70.1,25.27 68.2,25.27 67.98,25.06 v67.98,24.55
N$9
  Top 0.152: D3.A 60.97,11.58 R9.1
N$10  (via drill 0.3)
  Top 0.152: R11.2 v22.95,50.84
  Bottom 0.152: I2C3.1 21.38,49.28 v22.95,50.84
N$11  (via drill 0.3)
  Top 0.152: R10.2 v16.17,50.46
  Bottom 0.152: I2C3.3 18.54,50.93 18.29,51.18 16.38,51.18 16.17,50.97 v16.17,50.46
N$12
  Top 0.152: D4.A 9.16,37.49 R12.1
N$13  (via drill 0.3)
  Top 0.152: R14.2 v48.86,50.84
  Bottom 0.152: I2C4.1 47.29,49.28 v48.86,50.84
N$14  (via drill 0.3)
  Top 0.152: R13.2 v42.08,50.46
  Bottom 0.152: I2C4.3 44.45,50.93 44.2,51.18 42.29,51.18 42.08,50.97 v42.08,50.46
N$15
  Top 0.152: D5.A 35.06,37.49 R15.1
N$16  (via drill 0.3)
  Top 0.152: R17.2 v74.76,50.84
  Bottom 0.152: I2C5.1 73.2,49.28 v74.76,50.84
N$17  (via drill 0.3)
  Top 0.152: R16.2 v67.98,50.46
  Bottom 0.152: I2C5.3 70.36,50.93 70.1,51.18 68.2,51.18 67.98,50.97 v67.98,50.46
N$18
  Top 0.152: D6.A 60.97,37.49 R18.1
N$19  (via drill 0.3)
  Top 0.152: R20.2 v22.95,76.75
  Bottom 0.152: I2C6.1 21.38,75.18 v22.95,76.75
N$20  (via drill 0.3)
  Top 0.152: R19.2 v16.17,76.37
  Bottom 0.152: I2C6.3 18.54,76.84 18.29,77.09 16.38,77.09 16.17,76.87 v16.17,76.37
N$21
  Top 0.152: D7.A 9.16,63.4 R21.1
N$22  (via drill 0.3)
  Top 0.152: R23.2 v48.86,76.75
  Bottom 0.152: I2C7.1 47.29,75.18 v48.86,76.75
N$23  (via drill 0.3)
  Top 0.152: R22.2 v42.08,76.37
  Bottom 0.152: I2C7.3 44.45,76.84 44.2,77.09 42.29,77.09 42.08,76.87 v42.08,76.37
N$24
  Top 0.152: D8.A 35.06,63.4 R24.1
N$25  (via drill 0.3)
  Top 0.152: R26.2 v74.76,76.75
  Bottom 0.152: I2C8.1 73.2,75.18 v74.76,76.75
N$26  (via drill 0.3)
  Top 0.152: R25.2 v67.98,76.37
  Bottom 0.152: I2C8.3 70.36,76.84 70.1,77.09 68.2,77.09 67.98,76.87 v67.98,76.37
N$27
  Top 0.152: D9.A 60.97,63.4 R27.1
SCL  (via drill 0.3)
  Top 0.152: 21.21,22.1 25.53,22.1 26.57,21.06 J4.4 28.6,21.06 29.21,20.45 29.21,16.51 27.18,14.48 24.64,14.48 23.37,13.21 J3.4 | 21.21,22.1 20.32,22.1 | 20.32,22.1 10.67,22.1 9.4,20.83 9.4,18.8 10.14,18.06 J2.4 | 20.36,22.06 20.32,22.1 | R5.1 21.25,22.14 21.21,22.1 | U1.3 20.76,17.09 v20.83,17.02
  Bottom 0.152: v20.83,17.02 22.1,17.02 23.37,15.75 J3.4
SCL1  (via drill 0.3)
  Top 0.152: 47.12,22.1 51.43,22.1 52.47,21.06 J6.4 54.51,21.06 55.12,20.45 55.12,16.51 53.09,14.48 50.55,14.48 49.28,13.21 J5.4 | 47.12,22.1 46.23,22.1 | 46.23,22.1 36.58,22.1 35.31,20.83 35.31,18.8 36.04,18.06 J1.4 | 46.27,22.06 46.23,22.1 | R2.1 47.16,22.14 47.12,22.1 | U2.3 46.67,17.09 v46.74,17.02
  Bottom 0.152: v46.74,17.02 48.01,17.02 49.28,15.75 J5.4
SCL2  (via drill 0.3)
  Top 0.152: 73.03,22.1 77.34,22.1 78.38,21.06 J9.4 80.42,21.06 81.03,20.45 81.03,16.51 78.99,14.48 76.45,14.48 75.18,13.21 J8.4 | 73.03,22.1 72.14,22.1 | 72.14,22.1 62.48,22.1 61.21,20.83 61.21,18.8 61.95,18.06 J7.4 | 72.17,22.06 72.14,22.1 | R8.1 73.06,22.14 73.03,22.1 | U3.3 72.57,17.09 v72.64,17.02
  Bottom 0.152: v72.64,17.02 73.91,17.02 75.18,15.75 J8.4
SCL3  (via drill 0.3)
  Top 0.152: 21.21,48.01 25.53,48.01 26.57,46.97 J12.4 28.6,46.97 29.21,46.35 29.21,42.42 27.18,40.39 24.64,40.39 23.37,39.12 J11.4 | 21.21,48.01 20.32,48.01 | 20.32,48.01 10.67,48.01 9.4,46.74 9.4,44.7 10.14,43.97 J10.4 | 20.36,47.97 20.32,48.01 | R11.1 21.25,48.04 21.21,48.01 | U4.3 20.76,43 v20.83,42.93
  Bottom 0.152: v20.83,42.93 22.1,42.93 23.37,41.66 J11.4
SCL4  (via drill 0.3)
  Top 0.152: 47.12,48.01 51.43,48.01 52.47,46.97 J15.4 54.51,46.97 55.12,46.35 55.12,42.42 53.09,40.39 50.55,40.39 49.28,39.12 J14.4 | 47.12,48.01 46.23,48.01 | 46.23,48.01 36.58,48.01 35.31,46.74 35.31,44.7 36.04,43.97 J13.4 | 46.27,47.97 46.23,48.01 | R14.1 47.16,48.04 47.12,48.01 | U5.3 46.67,43 v46.74,42.93
  Bottom 0.152: v46.74,42.93 48.01,42.93 49.28,41.66 J14.4
SCL5  (via drill 0.3)
  Top 0.152: 73.03,48.01 77.34,48.01 78.38,46.97 J18.4 80.42,46.97 81.03,46.35 81.03,42.42 78.99,40.39 76.45,40.39 75.18,39.12 J17.4 | 73.03,48.01 72.14,48.01 | 72.14,48.01 62.48,48.01 61.21,46.74 61.21,44.7 61.95,43.97 J16.4 | 72.17,47.97 72.14,48.01 | R17.1 73.06,48.04 73.03,48.01 | U6.3 72.57,43 v72.64,42.93
  Bottom 0.152: v72.64,42.93 73.91,42.93 75.18,41.66 J17.4
SCL6  (via drill 0.3)
  Top 0.152: 21.21,73.91 25.53,73.91 26.57,72.87 J21.4 28.6,72.87 29.21,72.26 29.21,68.33 27.18,66.29 24.64,66.29 23.37,65.02 J20.4 | 21.21,73.91 20.32,73.91 | 20.32,73.91 10.67,73.91 9.4,72.64 9.4,70.61 10.14,69.87 J19.4 | 20.36,73.88 20.32,73.91 | R20.1 21.25,73.95 21.21,73.91 | U7.3 20.76,68.9 v20.83,68.83
  Bottom 0.152: v20.83,68.83 22.1,68.83 23.37,67.56 J20.4
SCL7  (via drill 0.3)
  Top 0.152: 47.12,73.91 51.43,73.91 52.47,72.87 J24.4 54.51,72.87 55.12,72.26 55.12,68.33 53.09,66.29 50.55,66.29 49.28,65.02 J23.4 | 47.12,73.91 46.23,73.91 | 46.23,73.91 36.58,73.91 35.31,72.64 35.31,70.61 36.04,69.87 J22.4 | 46.27,73.88 46.23,73.91 | R23.1 47.16,73.95 47.12,73.91 | U8.3 46.67,68.9 v46.74,68.83
  Bottom 0.152: v46.74,68.83 48.01,68.83 49.28,67.56 J23.4
SCL8  (via drill 0.3)
  Top 0.152: 73.03,73.91 77.34,73.91 78.38,72.87 J27.4 80.42,72.87 81.03,72.26 81.03,68.33 78.99,66.29 76.45,66.29 75.18,65.02 J26.4 | 73.03,73.91 72.14,73.91 | 72.14,73.91 62.48,73.91 61.21,72.64 61.21,70.61 61.95,69.87 J25.4 | 72.17,73.88 72.14,73.91 | R26.1 73.06,73.95 73.03,73.91 | U9.3 72.57,68.9 v72.64,68.83
  Bottom 0.152: v72.64,68.83 73.91,68.83 75.18,67.56 J26.4
SDA  (via drill 0.3)
  Top 0.152: v25.15,21.46 26.55,20.06 J4.3 28.07,20.06 28.45,19.68 28.45,17.02 27.18,15.75 20.83,15.75 | R4.1 17.87,24.3 17.53,24.64 v17.02,24.64 | 20.83,15.75 19.56,15.75 18.36,16.95 U1.2 15,18.56 14.99,18.54 14.47,19.06 J2.3 | J3.3 20.83,15.75
  Bottom 0.152: v25.15,21.46 17.65,21.46 17.02,22.1 v17.02,24.64
SDA1  (via drill 0.3)
  Top 0.152: v51.05,21.46 52.46,20.06 J6.3 53.98,20.06 54.36,19.68 54.36,17.02 53.09,15.75 46.74,15.75 | R1.1 43.78,24.3 43.43,24.64 v42.93,24.64 | 46.74,15.75 45.47,15.75 44.27,16.95 U2.2 40.91,18.56 40.89,18.54 40.38,19.06 J1.3 | J5.3 46.74,15.75
  Bottom 0.152: v51.05,21.46 43.56,21.46 42.93,22.1 v42.93,24.64
SDA2  (via drill 0.3)
  Top 0.152: v76.96,21.46 78.37,20.06 J9.3 79.89,20.06 80.26,19.68 80.26,17.02 78.99,15.75 72.64,15.75 | R7.1 69.68,24.3 69.34,24.64 v68.83,24.64 | 72.64,15.75 71.37,15.75 70.17,16.95 U3.2 66.82,18.56 66.8,18.54 66.29,19.06 J7.3 | J8.3 72.64,15.75
  Bottom 0.152: v76.96,21.46 69.47,21.46 68.83,22.1 v68.83,24.64
SDA3  (via drill 0.3)
  Top 0.152: v25.15,47.37 26.55,45.97 J12.3 28.07,45.97 28.45,45.59 28.45,42.93 27.18,41.66 20.83,41.66 | R10.1 17.87,50.2 17.53,50.55 v17.02,50.55 | 20.83,41.66 19.56,41.66 18.36,42.86 U4.2 15,44.47 14.99,44.45 14.47,44.97 J10.3 | J11.3 20.83,41.66
  Bottom 0.152: v25.15,47.37 17.65,47.37 17.02,48.01 v17.02,50.55
SDA4  (via drill 0.3)
  Top 0.152: v51.05,47.37 52.46,45.97 J15.3 53.98,45.97 54.36,45.59 54.36,42.93 53.09,41.66 46.74,41.66 | R13.1 43.78,50.2 43.43,50.55 v42.93,50.55 | 46.74,41.66 45.47,41.66 44.27,42.86 U5.2 40.91,44.47 40.89,44.45 40.38,44.97 J13.3 | J14.3 46.74,41.66
  Bottom 0.152: v51.05,47.37 43.56,47.37 42.93,48.01 v42.93,50.55
SDA5  (via drill 0.3)
  Top 0.152: v76.96,47.37 78.37,45.97 J18.3 79.89,45.97 80.26,45.59 80.26,42.93 78.99,41.66 72.64,41.66 | R16.1 69.68,50.2 69.34,50.55 v68.83,50.55 | 72.64,41.66 71.37,41.66 70.17,42.86 U6.2 66.82,44.47 66.8,44.45 66.29,44.97 J16.3 | J17.3 72.64,41.66
  Bottom 0.152: v76.96,47.37 69.47,47.37 68.83,48.01 v68.83,50.55
SDA6  (via drill 0.3)
  Top 0.152: v25.15,73.28 26.55,71.87 J21.3 28.07,71.87 28.45,71.5 28.45,68.83 27.18,67.56 20.83,67.56 | R19.1 17.87,76.11 17.53,76.45 v17.02,76.45 | 20.83,67.56 19.56,67.56 18.36,68.76 U7.2 15,70.37 14.99,70.36 14.47,70.87 J19.3 | J20.3 20.83,67.56
  Bottom 0.152: v25.15,73.28 17.65,73.28 17.02,73.91 v17.02,76.45
SDA7  (via drill 0.3)
  Top 0.152: v51.05,73.28 52.46,71.87 J24.3 53.98,71.87 54.36,71.5 54.36,68.83 53.09,67.56 46.74,67.56 | R22.1 43.78,76.11 43.43,76.45 v42.93,76.45 | 46.74,67.56 45.47,67.56 44.27,68.76 U8.2 40.91,70.37 40.89,70.36 40.38,70.87 J22.3 | J23.3 46.74,67.56
  Bottom 0.152: v51.05,73.28 43.56,73.28 42.93,73.91 v42.93,76.45
SDA8  (via drill 0.3)
  Top 0.152: v76.96,73.28 78.37,71.87 J27.3 79.89,71.87 80.26,71.5 80.26,68.83 78.99,67.56 72.64,67.56 | R25.1 69.68,76.11 69.34,76.45 v68.83,76.45 | 72.64,67.56 71.37,67.56 70.17,68.76 U9.2 66.82,70.37 66.8,70.36 66.29,70.87 J25.3 | J26.3 72.64,67.56
  Bottom 0.152: v76.96,73.28 69.47,73.28 68.83,73.91 v68.83,76.45

## Text on the board
Bottom: X01 | X01 | X01 | X01 | X01 | X01 | X01 | X01 | X01
Milling: v-score | v-score | v-score | v-score | v-score | v-score | v-score | v-score